# Altium PCB CH32F20xR-R0-1v0.PcbDoc
Units mil, origin at the board's own origin, x right, y up, seen from the top; angles counter-clockwise.
Board outline 2755.91 x 2559.06 mil, 2 copper layers (Top Layer, Bottom Layer); 44 components, 73 nets, 247 pads, 654 vias.
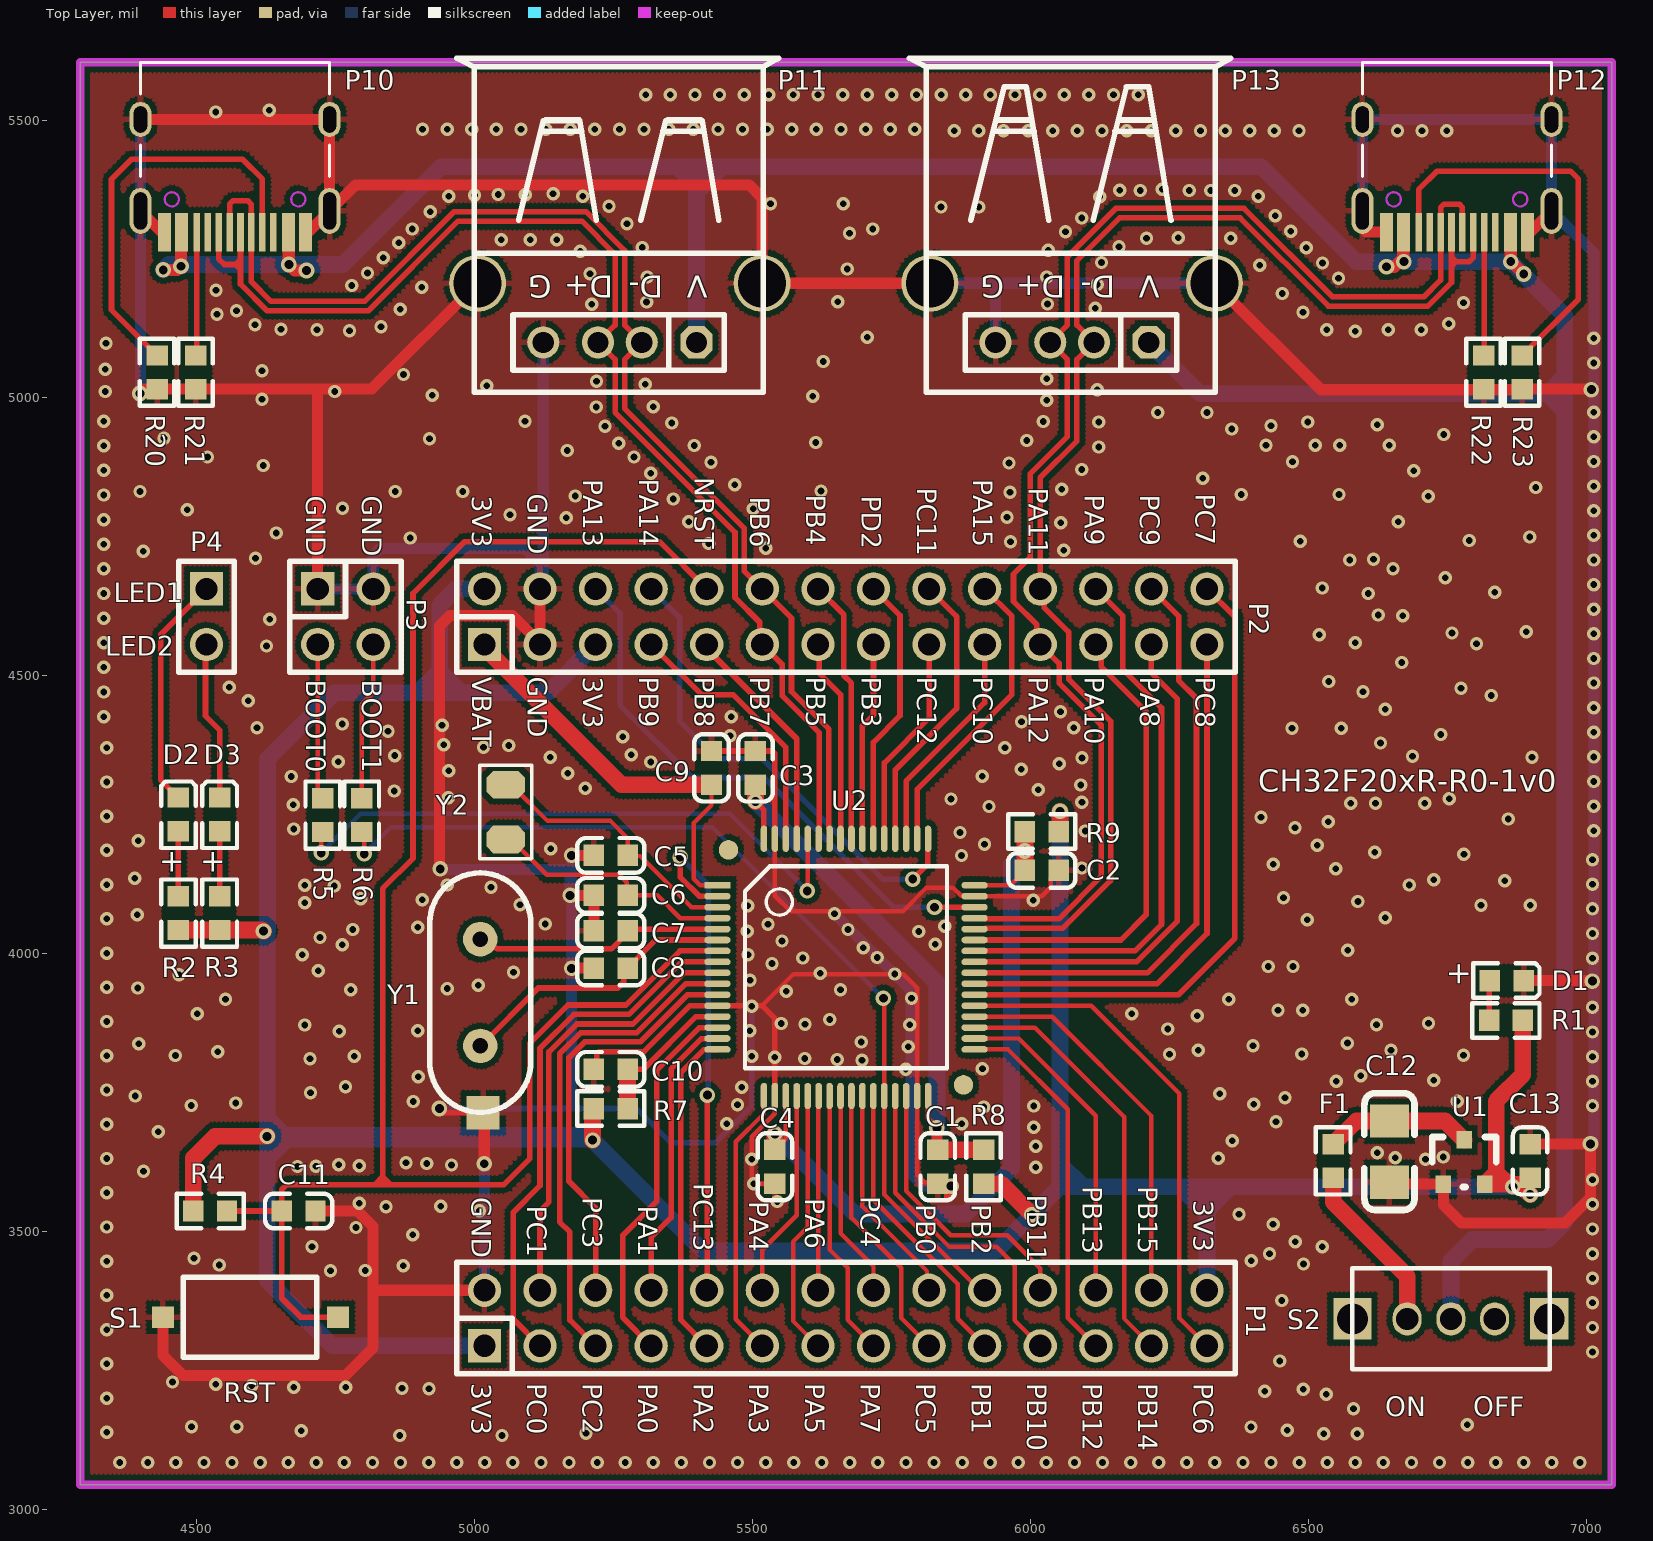
[diagram p0: Top Layer view]
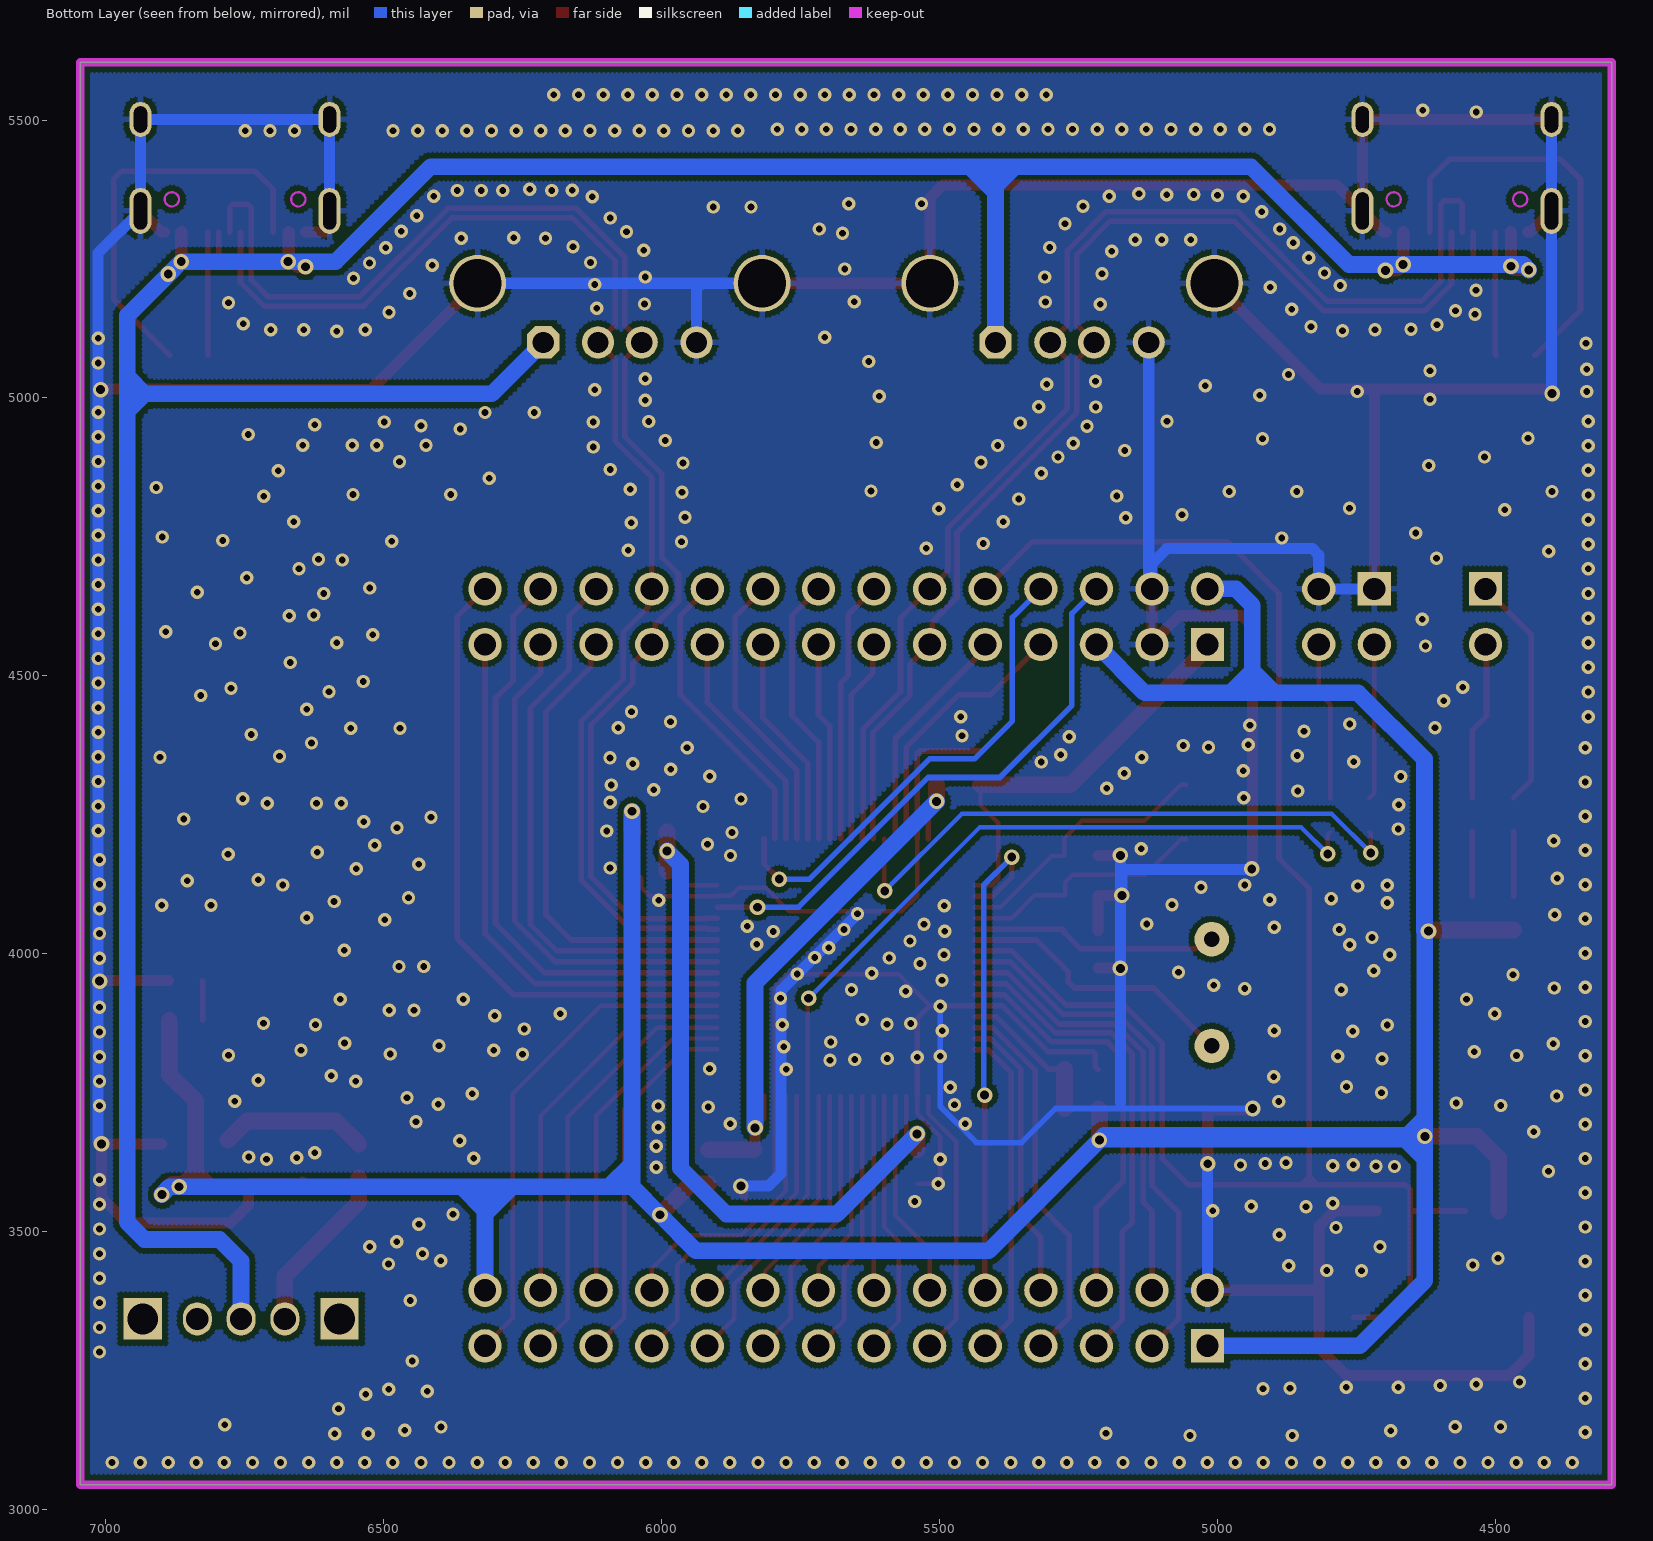
[diagram p1: Bottom Layer view, seen from below]

## Layer stack, top to bottom
Top Solder: solder mask 0.4, Solder Resist, Dk 3.5
Top Layer: signal copper 1.4
Dielectric 1: dielectric 12.6, FR-4, Dk 4.8
Bottom Layer: signal copper 1.4
Bottom Solder: solder mask 0.4, Solder Resist, Dk 3.5

## Board outline
4290,3045 4290,5604.06 7045.91,5604.06 7045.91,3045

## Design rules (kind name [scope] priority, off if disabled: settings)
Clearance Clearance_1 [InPolygon] p1: gap=10 ignorepadtopadclearanceinfootprint=FALSE
Clearance [All] p2: gap=6 ignorepadtopadclearanceinfootprint=FALSE
ComponentClearance [All] p1 off: gap=10 collisioncheckmode=3 verticalgap=10 showdistances=FALSE
DiffPairsRouting [All] p1: maxlimit=10 minlimit=7 mostfreqgap=8 toplayer_minwidth=6 toplayer_maxwidth=15 toplayer_prefwidth=8 bottomlayer_minwidth=6 bottomlayer_maxwidth=15 bottomlayer_prefwidth=8 maxuncoupledlength=500
MinimumSolderMaskSliver [All] p1 off: minsoldermaskwidth=10
PolygonConnect PolygonConnect_1 [IsVia] p1: connectstyle=Direct reliefconductorwidth=10 reliefentries=4 polygonreliefangle="90 Angle" airgapwidth=10
PolygonConnect [All] p2: connectstyle=Relief reliefconductorwidth=10 reliefentries=4 polygonreliefangle="90 Angle" airgapwidth=10
RoutingVias [All] p1: holewidth=16 width=28 viastyle="Through Hole" minholewidth=12 minwidth=24 maxholewidth=28 maxwidth=50
SilkToSilkClearance [All] p1 off: silktosilkclearance=10
SilkToSolderMaskClearance [IsPad] p1 off: minsilkscreentomaskgap=10 clearancetoexposedcopper=TRUE
SolderMaskExpansion [All] p1: expansion=4 istentingtop=FALSE
Width [All] p1: maxlimit=100 minlimit=6 preferedwidth=10
25 further rules are at their usual default settings.

## Classes and differential pairs
differential pair NewDifferentialPair2: +PB6 -PB7
differential pair NewDifferentialPair1: +PA12 -PA11

## Components (designator, comment, footprint, x,y, rotation, side; value= is the part's Value field where it differs from the comment)
C1 "0.1uF" 0603_C 5833,3586.5 r90 top value=15pF
C2 "0.1uF" 0603_C 6050.47,4149.94 r180 top value=15pF
C3 "0.1uF" 0603_C 5505,4364.76 r270 top value=15pF
C4 "0.1uF" 0603_C 5540,3586.5 r90 top value=15pF
C5 "12pF" 0603_C 5275,4177.13 r180 top
C6 "12pF" 0603_C 5275,4105.13 r180 top
C7 "22pF" 0603_C 5214.37,4041.13 r0 top
C8 "22pF" 0603_C 5214.37,3974.13 r0 top
C9 "0.1uF" 0603_C 5425.98,4304.13 r90 top value=15pF
C10 "0.1uF" 0603_C 5275,3792.13 r180 top value=15pF
C11 "0.1uF" 0603_C 4713.48,3537.23 r180 top
C12 "10uF" 3216_C 6645.62,3699.09 r90 top
C13 "2.2uF" 0603_C 6898.76,3596.94 r90 top
D1 "POWER  red" 0603+ 6826.38,3951.67 r0 top
D2 "LED1   blue" 0603+ 4466.87,4220.46 r90 top
D3 "LED2  blue" 0603+ 4541.14,4220.46 r90 top
F1 "500mA" 0603 6544.45,3596.94 r90 top
P1 "HEADER 14x2" IDC28-2.54MM 5017.45,3294.61 r90 top
P2 "HEADER 14x2" IDC28-2.54MM 5017.45,4556.42 r90 top
P3 "HEADER 2x2" IDC4-2.54MM 4717.45,4656.42 r0 top
P4 "HEADER 2" SIP2-2.54mm 4517.45,4656.42 r180 top
P10 "TYPE-C" TYPE-C-Receptacle-2.0 4568.76,5298.31 r180 top
P11 "USB_A" USBAF 5398.88,5100 r180 top
P12 "TYPE-C" TYPE-C-Receptacle-2.0 6767.14,5298.31 r180 top
P13 "USB_A" USBAF 6212.61,5100 r180 top
R1 "1K" 0603 6825,3880 r0 top
R2 "1K" 0603 4466.87,4042.81 r90 top
R3 "1K" 0603 4541.14,4042.81 r90 top
R4 "10K" 0603 4554.31,3537.23 r180 top
R5 "10K" 0603 4726.59,4219.09 r90 top
R6 "10K" 0603 4796.59,4219.09 r90 top
R7 "0Ω" 0603 5214.37,3721.36 r0 top value=10K
R8 "0Ω" 0603 5915.43,3586.5 r90 top value=10K
R9 "0Ω" 0603 6050.47,4219.77 r180 top value=10K
R20 "NC(5.1K)" 0603 4428.59,5076.43 r270 top
R21 "NC(5.1K)" 0603 4497.78,5076.43 r270 top
R22 "NC(5.1K)" 0603 6815.08,5076.43 r270 top
R23 "NC(5.1K)" 0603 6884.32,5076.43 r270 top
S1 "RST" SMD_6.1x3.65x2.5mm-KEY 4754,3346 r180 top
S2 "SW" KEY2 6756.26,3343 r180 top
U1 "CE6219" SOT-23 6742.6,3585.47 r0 top
U2 "CH32F205R" LQFP64M_10x10 5436.58,4123.15 r270 top
Y1 "8M" XT_AT49 5010,3834.13 r0 top
Y2 "32.768k" FC-135 5055.87,4304.13 r270 top

## Footprints (in the part's own frame and the unit in brackets; to place one, negate y for a bottom-side part, rotate by r counter-clockwise, add the part's x,y. Pads: shape width x height; smd on the part's side, far side on the other; paste and mask are expansions set on the pad)
0603 [mm]
  rect 0.93x0.98 smd: 1(0,0) 2(1.54,0)
  silkscreen extent -0.76,-0.79 2.3,0.79
0603+ [mm]
  rect 0.93x0.98 smd: 1(0,0) 2(1.54,0)
  silkscreen extent -0.76,-0.79 2.27,0.79
0603_C [mm]
  rect 0.93x0.98 smd: 1(0,0) 2(1.54,0)
  silkscreen extent -0.76,-0.79 2.31,0.79
3216_C [mil]
  rect 60x70 smd: 1(0,0) 2(-110,0)
  silkscreen extent -160,-45 50,45
FC-135 [mil]
  oct 50x70 smd: 1(0,0) 2(98.43,0)
  silkscreen extent -35,-47 133,47
IDC4-2.54MM [mil]
  rect 60x60 hole 40: 1(0,0)
  round 60 hole 40: 2(100,0) 3(0,-100) 4(100,-100)
  silkscreen extent -50,-150 150,50
IDC28-2.54MM [mil]
  rect 60x60 hole 40: 1(0,0)
  round 60 hole 40: 2(100,0) 3(0,-100) 4(100,-100) 5(0,-200) 6(100,-200) 7(0,-300) 8(100,-300) 9(0,-400) 10(100,-400) 11(0,-500) 12(100,-500) 13(0,-600) 14(100,-600) 15(0,-700) 16(100,-700) 17(0,-800) 18(100,-800) 19(0,-900) 20(100,-900) 21(0,-1000) 22(100,-1000) 23(0,-1100) 24(100,-1100) 25(0,-1200) 26(100,-1200) 27(0,-1300) 28(100,-1300)
  silkscreen extent -50,-1351 150,50
KEY2 [mm]
  rect 1.75x1.9 hole 1.4: 0(-4.5,0) 0(4.5,0)
  oval 1.321x1.524 hole 1.016: 1(0,0) 2(-2,0) 3(2,0)
  silkscreen extent -4.51,-2.31 4.5,2.29
LQFP64M_10x10 [mm]
  round 0.889 smd: 0(-1.619,0.508) 0(9.119,11.246)
  rect 0.3x1.2 smd: 1(0,0)
  oval 0.3x1.2 smd: 2(0.5,0) 3(1,0) 4(1.5,0) 5(2,0) 6(2.5,0) 7(3,0) 8(3.5,0) 9(4,0) 10(4.5,0) 11(5,0) 12(5.5,0) 13(6,0) 14(6.5,0) 15(7,0) 16(7.5,0) 33(7.5,11.754) 34(7,11.754) 35(6.5,11.754) 36(6,11.754) 37(5.5,11.754) 38(5,11.754) 39(4.5,11.754) 40(4,11.754) 41(3.5,11.754) 42(3,11.754) 43(2.5,11.754) 44(2,11.754) 45(1.5,11.754) 46(1,11.754) 47(0.5,11.754) 48(0,11.754)
  oval 1.2x0.3 smd: 17(9.627,2.127) 18(9.627,2.627) 19(9.627,3.127) 20(9.627,3.627) 21(9.627,4.127) 22(9.627,4.627) 23(9.627,5.127) 24(9.627,5.627) 25(9.627,6.127) 26(9.627,6.627) 27(9.627,7.127) 28(9.627,7.627) 29(9.627,8.127) 30(9.627,8.627) 31(9.627,9.127) 32(9.627,9.627) 49(-2.127,9.627) 50(-2.127,9.127) 51(-2.127,8.627) 52(-2.127,8.127) 53(-2.127,7.627) 54(-2.127,7.127) 55(-2.127,6.627) 56(-2.127,6.127) 57(-2.127,5.627) 58(-2.127,5.127) 59(-2.127,4.627) 60(-2.127,4.127) 61(-2.127,3.627) 62(-2.127,3.127) 63(-2.127,2.627) 64(-2.127,2.127)
  silkscreen extent -0.86,1.26 8.37,10.49
SIP2-2.54mm [mil]
  rect 60x60 hole 40: 1(0,0)
  round 60 hole 40: 2(0,100)
  silkscreen extent -50,-50 50,150
SMD_6.1x3.65x2.5mm-KEY [mm]
  rect 1x1 smd: 1(0,0) 2(8,0)
  silkscreen extent 0.98,-1.83 7.08,1.83
SOT-23 [mm]
  rect 0.7x0.8 smd: 1(0,0) 2(1.9,0) 3(0.95,2.02)
  silkscreen extent -0.51,-0.13 2.41,2.16
TYPE-C-Receptacle-2.0 [mm]
  oval 1x2.1 hole 0.6 slot 1.7 at 90 deg: 0(-4.32,-0.97) 0(4.32,-0.97)
  oval 1x1.6 hole 0.6 slot 1.2 at 90 deg: 0(-4.32,-5.15) 0(4.32,-5.15)
  rect 0.6x1.75 smd: A1(-3.225,0) A4(-2.45,0) B1(3.225,0) B4(2.45,0)
  rect 0.3x1.75 smd: A5(-1.25,0) A6(-0.25,0) A7(0.25,0) A8(1.25,0) B5(1.75,0) B6(0.75,0) B7(-0.75,0) B8(-1.75,0)
  Keep-Out Layer circle w0.1: c-2.89,-1.5 r0.325
  Keep-Out Layer circle w0.1: c2.89,-1.5 r0.325
  silkscreen extent -4.32,-7.75 4.32,-2.55
USBAF [mm]
  round 2.6 hole 2.2: 0(-3,-2.7) 0(10,-2.7)
  oct 1.473x1.473 hole 0.965: 1(0,0)
  round 1.473 hole 0.965: 2(2.5,0) 3(4.5,0) 4(7,0)
  silkscreen extent -3.75,-12.99 10.95,2.29
XT_AT49 [mil]
  rect 60x60 smd: 0(5,-120)
  round 62 hole 28: 1(0,0) 2(0,192.13)
  silkscreen extent -91,-119 91,311

## Part data
C1 C2 C3 C4 C5 C6 C7 C8 C9 C10 C11: library part Cap, "Capacitor", LatestRevisionDate=17-Jul-2002, LatestRevisionNote="Re-released for DXP Platform.", PackageReference=RAD-0.3, Published=8-Jun-2000, Publisher="Altium Limited"
C12 C13: library part CAP, "Capacitor"
D1 D2 D3: library part LED0, "Typical INFRARED GaAs LED", LatestRevisionDate=08-Jul-2005, LatestRevisionNote="Mech Layer 1 removed.", PackageReference=LED-0, Published=8-Jun-2000, Publisher="Altium Limited"
F1: library part FUSE1, "Fuse"
P1 P2: "Header, 14-Pin, Dual row"
P3: "Header, 2-Pin, Dual row"
P4: "Header, 2-Pin"
P10 P12: library part TYPE-C1
P11 P13: library part USB, "USB Port"
R1 R2 R3: library part "Res Semi", "Semiconductor Resistor", LatestRevisionDate=17-Jul-2002, LatestRevisionNote="Re-released for DXP Platform.", PackageReference=AXIAL-0.5, Published=8-Jun-2000, Publisher="Altium Limited"
R4 R5 R6 R7 R8 R9 R20 R21 R22 R23: library part Res2, "Resistor"
  R4 R5 R6 R7 R8 R9: LatestRevisionDate=17-Jul-2002, LatestRevisionNote="Re-released for DXP Platform.", PackageReference=AXIAL-0.4, Published=8-Jun-2000, Publisher="Altium Limited"
S1: library part KEY
U1: library part 6219P33M
U2: library part CH32F203R, "ARM M3 HD-MCU, 144MHz, 8*UART, 10*Timer, 4*OPA"
Y1 Y2: library part XTAL, "Crystal Oscillator", LatestRevisionDate=17-Jul-2002, LatestRevisionNote="Re-released for DXP Platform.", PackageReference=R38, Published=8-Jun-2000, Publisher="Altium Limited"

## Via types
v1: diameter 24, hole 12, Top Layer to Bottom Layer, tented both sides, 616 vias
v2: diameter 28, hole 16, Top Layer to Bottom Layer, tented both sides, 38 vias

## Nets (pads, with @x,y where several pads share a name; then routed paths per layer and width w, separated by ;. In a path a pad name is that pad's centre, name@x,y a point inside that pad or via, vN(x,y) a via of type N, cw(c..) or ccw(c..) an arc to the next point about the centre after c; other vN are vias at no path point)
+5V: P10.A4 P10.B4 P11.1 P12.A4 P12.B4 P13.1 S2.1 | length 6409.9
  Top Layer w22: v2(4439.62,5230.28) 4464.93,5230.28 v2(4471.49,5236.84) 4471.49,5297.49 P10.B4 ; P10.A4 4665.22,5240.39 v2(4665.56,5240.05) 4676.3,5229.31 v2(4697.39,5229.31) ; v2(6640.39,5235.94) 6654.42,5235.94 v2@6670.69,5252.21 ; P12.B4 v2@6670.69,5252.21 ; v2(6671.78,5245.29) 6670.69,5246.38 v2@6670.69,5252.21 ; v2(6863.9,5245.29) v2@6863.9,5246.38 ; v2(6887.3,5222.99) v2@6863.9,5246.38 ; v2@6863.9,5246.38 6863.6,5246.68 P12.A4 6863.9,5298 v2@6863.9,5246.38
  Bottom Layer w22: v2(4697.39,5229.31) v2@4698.55,5230.47 ; v2(6887.3,5222.99) v2@6887.81,5222.99
  Bottom Layer w30: v2(4439.62,5230.28) 4449.39,5240.05 v2@4474.7,5240.05 ; v2(4471.49,5236.84) v2@4474.7,5240.05 ; P11.1 5398.88,5369.42 ; P13.1 6305.29,5007.33 6929.89,5007.33 ; S2.1 6756.26,3447.53 6794.71,3485.99 6929.94,3485.99 6960.83,3516.88 6960.83,4976.39 ; v2@4474.7,5240.05 v2(4665.56,5240.05) 4697.39,5240.05 4763.33,5240.05 4939.25,5415.97 5364.12,5415.97 ; 5364.12,5415.97 5398.88,5415.97 ; 5364.12,5415.97 5398.88,5381.21 ; 5398.88,5369.42 5398.88,5381.21 ; 5398.88,5369.42 5445.43,5415.97 ; 5398.88,5381.21 5398.88,5415.97 ; 5398.88,5415.97 5445.43,5415.97 ; 5445.43,5415.97 6415.27,5415.97 6585.95,5245.29 6640.39,5245.29 v2(6671.78,5245.29) v2(6863.9,5245.29) 6886.75,5222.44 6960.83,5148.36 6960.83,5038.27 ; 6929.89,5007.33 6960.83,4976.39 ; 6929.89,5007.33 6960.83,5007.33 ; 6929.89,5007.33 6960.83,5038.27 ; 6960.83,4976.39 6960.83,5007.33 ; 6960.83,5007.33 6960.83,5038.27
BOOT0: R5.1 U2.60 | length 1093.1
  Top Layer w8: v2(4723.93,4181.62) 4723.93,4216.42 R5.1 ; v2(5598.16,4113.21) 5599.06,4114.11 U2.60
  Bottom Layer w8: v2(4723.93,4181.62) 4793.89,4251.59 5459.78,4251.59 v2(5598.16,4113.21)
BOOT1: P1.20 R6.1 U2.28 | length 1727.9
  Top Layer w8: R6.1 4801.28,4214.4 v2(4801.28,4179.69) ; v2(5735.07,3919.93) 5736.85,3918.15 U2.28 5736.85,3566.94 5909.18,3394.61 P1.20
  Bottom Layer w8: v2(4801.28,4179.69) 4848.9,4227.3 5427.7,4227.3 v2(5735.07,3919.93)
GND: C1.1 C2.1 C3.1 C4.1 C5.2 C6.2 C7.1 C8.1 C9.2 C10.2 C11.1 C12.2 C13.2 D1.2 P1.2 P2.3 P2.4 P3.1 P3.2 P10.0 P10.A1 P10.B1 P11.0 P11.4 P12.0 P12.A1 P12.B1 P13.0 P13.4 R20.2 R21.2 R22.2 R23.2 S1.2 U1.1 U2.12 U2.18 U2.31 U2.47 U2.63 Y1.0 | length 15990.7
  Top Layer w8: 5516.71,3906.61 5573.58,3963.48 5770.98,3963.48 5795.91,3938.56 U2.31 5795.91,3602.39 5809.22,3589.07 5831.42,3589.07 5848.29,3572.2 5848.29,3557.18 5857.16,3566.05 v2(5857.16,3582.01) ; C4.1 v1(5501.88,3586.5) 5498.37,3590.02 5498.37,3670.74 5540,3712.37 U2.18 ; U2.63 5540,4104.45 5568.32,4076.13 5769.92,4076.13 5812.86,4119.07 5860.19,4119.07 5875.07,4104.19 5898.6,4104.19 U2.47 6020.19,4103.46 6036.17,4119.44 6036.17,4135.64 C2.1
  Top Layer w10: v2(4936.31,3721.57) 4943.75,3714.13 Y1.0 ; C10.2 5219.18,3796.94 5219.18,3819.63 5223.57,3824.02 5304.68,3824.02 5387.27,3906.61 U2.12 5516.71,3906.61 5540,3883.33 U2.18 ; C9.2 C3.1 5535.61,4364.76 5540,4360.37 U2.63
  Top Layer w20: v2(4397.49,5008.02) 4405.26,5015.8 R20.2 R21.2 4717.45,5015.8 ; P10.0@4398.69,5336.5 4436.87,5298.31 P10.B1 ; P10.0@4398.69,5501.06 4738.84,5501.06 P10.0@4738.84,5336.5 ; S1.2 4439.04,3277.49 4475.02,3241.51 4767.37,3241.51 4816.95,3291.08 4816.95,3400.03 ; P10.A1 4700.65,5298.31 P10.0@4738.84,5336.5 ; C11.1 4788.7,3537.23 4816.95,3508.98 4816.95,3400.03 ; P3.1 4717.45,5015.8 ; v2(4938.03,4152.8) 4936.62,4154.21 4936.62,4589.73 4955.28,4608.39 5068.05,4608.39 5117.45,4558.98 P2.4 ; P11.0@5005.18,5206.3 4814.68,5015.8 4717.45,5015.8 ; Y1.0 5018.69,3710.44 5017.09,3708.84 v2(5017.09,3622.19) ; P1.2 4822.37,3394.61 4816.95,3400.03 ; v2(5171.67,4105.13) C6.2 C7.1 ; v2(5174.32,3973.63) 5174.82,3974.13 C8.1 ; v2(5174.3,4177.13) C5.2 ; P13.0@5818.91,5206.3 5516.99,5206.3 5516.99,5360.13 5494.23,5382.89 4785.23,5382.89 P10.0@4738.84,5336.5 ; P13.0@6330.72,5206.3 6522.3,5014.73 6883.25,5014.73 R23.2 7008.45,5015.8 v2(7009.13,5015.11) ; P12.0@6597.06,5336.5 6597.06,5304.55 6603.31,5298.31 P12.B1 ; C12.2 6649.24,3585.47 U1.1 6742.6,3548.06 6774.99,3515.66 6961.2,3515.66 7007.42,3561.89 v2(7007.42,3657.84) 6899.03,3657.84 C13.2 ; D1.2 7009.67,3951.67 v2(7010.67,3950.67) ; P12.A1 6899.03,5298.31 P12.0@6937.22,5336.5
  Bottom Layer w10: v2(4936.31,3721.57) 5290.75,3721.57 5352.16,3660.16 5433.46,3660.16 5498.38,3725.08 v1(5498.38,3905.81)
  Bottom Layer w20: v2(4397.49,5008.02) 4398.69,5009.22 4398.69,5336.5 P10.0@4398.69,5501.06 ; P3.1 P3.2 4817.45,4717.34 4828.92,4728.81 5090.83,4728.81 5117.45,4702.19 P2.4 5123.29,4662.26 P11.4 ; v2(4938.03,4152.8) 4938.03,4151.36 5171.67,4151.36 v2(5171.67,4105.13) ; v2(5017.09,3622.19) 5017.45,3621.83 P1.2 ; 5174.3,3732.72 v2@5174.3,4105.13 ; v2@5174.3,4106.7 v2(5174.3,4177.13) ; v1(5647.27,4071.81) 5784.78,3934.3 5784.78,3605.05 5807.81,3582.01 v2(5857.16,3582.01) ; P13.0@5818.91,5206.3 5927.25,5206.3 ; P13.4 5937.02,5196.52 5927.25,5206.3 ; P13.0@6330.72,5206.3 5927.25,5206.3 ; P12.0@6597.06,5336.5 6597.06,5501.06 6937.22,5501.06 6937.22,5336.5 7013.39,5260.33 7013.39,3663.81 v2(7007.42,3657.84) ; v2(7009.13,5015.11) v2@7010.79,5015.11
  other v1: 4361.35,3084.64 4411.87,3084.64 4462.39,3084.64 4512.91,3084.64 4563.43,3084.64 4613.95,3084.64 4664.46,3084.64 4714.98,3084.64 4765.5,3084.64 4816.02,3084.64 4866.54,3084.64 4917.06,3084.64 4967.58,3084.64 5018.1,3084.64 5068.62,3084.64 5119.14,3084.64 5169.66,3084.64 5220.18,3084.64 5270.7,3084.64 5321.22,3084.64 5371.73,3084.64 5422.25,3084.64 5472.77,3084.64 5523.29,3084.64 5573.81,3084.64 5624.33,3084.64 5674.85,3084.64 5725.37,3084.64 5775.89,3084.64 5826.41,3084.64 5876.93,3084.64 5927.45,3084.64 5977.97,3084.64 6028.49,3084.64 6079,3084.64 6129.52,3084.64 6180.04,3084.64 6230.56,3084.64 6281.08,3084.64 6331.6,3084.64 6382.12,3084.64 6432.64,3084.64 6483.16,3084.64 6533.68,3084.64 6584.2,3084.64 6634.72,3084.64 6685.24,3084.64 6735.76,3084.64 6786.27,3084.64 6836.79,3084.64 6887.31,3084.64 6937.83,3084.64 6988.35,3084.64 4864.98,3133.34 5049.17,3133.34 6527.64,3136.21 6587.74,3136.21 5200.24,3137.48 4337.7,3139.01 4688.03,3141.62 6462.08,3143.04 4490.4,3148.86 4572.14,3148.86 6396.52,3148.5 6785.65,3152.6 6580.91,3181.28 4337.7,3200.6 6531.74,3207.23 6421.1,3212.7 4917.75,3217.15 6490.76,3216.8 4869.12,3218.19 4674.58,3220.26 4767.71,3220.26 4599.05,3223.36 4533.86,3225.43 4456.25,3229.57 4337.7,3262.18 6448.42,3267.33 7010.97,3283.4 4337.7,3323.77 7010.97,3327.69 7010.97,3371.98 6451.98,3376.13 4337.7,3385.35 7010.97,3416.28 4740.62,3429.52 4803.28,3430.29 4871.35,3438.8 4540.33,3439.96 6491.1,3441.79 4337.7,3446.93 6397.2,3447.5 4494.88,3452.36 6429.77,3460.27 7010.97,3460.57 4707.36,3472.84 6525.05,3473.04 6476.2,3481.69 4888.37,3494.5 7010.97,3504.87 4786.26,3507.65 4337.7,3508.52 6436.32,3513.17 6375,3531.64 5008.27,3537.82 4840.41,3544.78 4938.65,3545.55 7010.97,3549.16 4792.45,3550.97 5544,3554.2 4337.7,3570.1 7010.97,3593.45 4404.1,3608.86 6009.57,3615.91 4681.17,3617.2 4714.41,3617.99 4792.38,3618.78 4755.18,3620.37 4958.3,3620.11 4913.92,3622.75 4876.4,3623.8 5498.37,3630.38 6710.46,3630.43 4337.7,3631.69 6337.91,3632.31 6656,3633.09 6742.75,3634.26 6623.71,3642.04 6009.57,3653.41 6362.71,3663.79 4430.54,3679.69 6005.94,3687.89 4337.7,3693.27 5453.38,3694.34 5876.49,3693.94 6441.71,3697.98 5915.81,3724.19 6005.94,3726 7010.97,3726.34 4490.04,3726.91 5472.77,3728.12 6401.83,3729.46 4570.32,3731.64 4889.24,3734.12 6767.92,3734.49 6457.86,3741.1 4389.4,3744.06 6340.5,3747.93 4704.65,3750 4337.7,3754.86 4767.42,3760.46 5480.52,3759.69 6550.02,3770.59 7010.97,3770.63 6725.28,3772.73 4898.54,3778.87 6594.31,3780.37 5775.64,3792.11 5913.39,3793.15 5696.68,3808.13 5652.24,3809.91 4703.7,3810.87 5593.58,3811.68 5540,3813.73 5498.38,3815.44 7010.97,3814.92 4337.7,3816.44 4783.22,3815.72 4461.5,3816.94 6778.93,3817.64 6250.03,3819.04 6488.06,3819.73 4537.51,3823.99 6301.47,3826.33 6648.57,3826.26 5779.77,3832.87 6400.32,3834.32 4395.67,3838.1 6570.06,3839.31 5695.5,3841.31 7010.97,3859.22 4756.01,3860.33 4897.27,3861.31 5494.63,3861.46 6247.09,3864.57 4694.19,3871.74 5782.73,3872.45 6622.42,3872.14 5594.17,3873.31 5551.51,3874.49 6715.84,3875.25 4337.7,3878.03 5638.61,3881.6 6299.66,3888.35 4500.68,3892.17 6182.2,3892.18 6445.24,3898.36 6489.54,3898.36 7010.97,3903.51 4551.67,3918.04 6356.65,3918.02 6578.12,3918.02 5785.68,3919.71 5560.4,3932.56 4777.13,3934.99 5658.07,3935.07 4950.43,3937.36 4393.64,3938.32 4337.7,3939.61 5006.44,3943.45 5495.22,3952.12 4467.83,3962.1 5755.6,3963.48 5621.45,3965.2 5069.87,3966.94 4718.23,3969.4 6427.78,3976.99 6472.07,3976.99 5534.92,3982.34 5590.14,3992.38 7010.97,3992.1 5724.08,3993.4 4689.52,3998.22 5491.66,3998.33 4337.7,4001.2 6570.79,4006.11 5699,4010.65 4761.53,4016.13 5828.56,4017.11 5552.92,4023.1 4721.67,4029.19 7010.97,4036.39 5490.48,4040.4 5799.09,4040.04 4780.77,4043.62 5671.56,4043.57 4897.62,4047.6 5845.59,4049.21 5527.51,4053.22 5126.62,4053.65 6497.77,4061.22 4337.7,4062.78 6638.37,4064.69 4393.07,4070.44 7010.97,4080.69 5491.07,4086.62 5081.43,4088.04 6810.42,4087.57 6899.01,4087.57 4694.18,4091.73 6588.95,4094.17 6004.91,4096.26 4905.73,4097.08 4795.2,4099.29 6455.06,4100.97 5029.37,4119.47 4747.1,4121.96 4694.18,4123.34 4337.7,4124.37 4950.34,4123.84 6681.11,4123.66 7010.97,4124.98 6853.13,4131.38 6725.4,4133.45 4388.04,4135.92 6549.07,4153.15 6092.4,4154.27 6436.75,4161.33 7010.97,4169.27 5875.85,4176.83 6779.66,4179.33 6619.15,4182.63 4337.7,4185.95 5136.55,4189.13 6515.76,4195.52 5917.2,4196.96 4394.51,4203.56 5873.13,4218.18 6098.4,4220.91 7013.34,4221.27 4674.44,4224.49 6475.88,4227 6535.51,4237.28 6859.34,4242.5 6414.55,4245.47 4337.7,4247.54 5925.36,4264.97 7013.34,4265.56 4673.64,4268.16 6576.33,4271.09 6620.63,4271.09 6709.21,4271.09 6092.4,4272.53 5856.81,4278.57 6753.51,4278.76 4952.58,4280.88 4855.29,4292.95 6013.62,4295.22 5198.56,4297.7 6090,4303.75 4337.7,4309.12 7013.34,4309.86 4669.67,4318.97 5912.91,4319.35 5167.58,4325.04 4953.39,4329.39 5983.15,4331.96 6051.46,4342.03 4754.62,4345.17 5316.76,4345.14 6092.62,4352.36 5135.99,4353.59 6902.05,4353.62 7013.34,4354.15 6687.29,4355.42 4855.92,4356.55 5281.88,4358.25 4337.7,4370.71 5015.65,4371.44 5953.87,4370.91 5060.93,4374.68 4944.49,4376.29 6629.58,4379.3 5266.32,4390.44 5459.27,4392 6737.9,4394.34 7013.34,4398.44 4844.07,4400.2 4608.18,4406.37 6077.47,4406.34 6470.28,4405.56 6558.87,4405.56 4941.26,4411.06 4761.77,4413.45 5983.65,4417.25 5461.36,4426.18 4332.61,4426.69 6053.8,4435.69 6637.87,4439.75 7013.34,4442.74 4592.33,4454.98 6828.58,4464.74 4332.61,4470.99 6597.99,4471.22 6774.32,4477.61 4558.52,4479.28 7013.34,4487.03 6536.66,4489.7 4332.61,4515.28 6668.07,4524.08 7013.34,4531.33 4625.47,4553.74 6802.43,4557.67 4332.61,4559.57 6584.43,4559.68 6519.2,4573.83 7013.34,4575.62 6758.13,4577.04 6892.1,4579.43 4631.32,4601.64 4332.61,4603.87 6669.55,4608.41 6625.25,4609.4 7013.34,4619.91 4332.61,4648.16 6607.78,4648.14 6834.89,4650.6 6524.83,4657.97 7013.34,4664.21 6746.3,4676.46 4332.61,4692.46 6652.08,4692.73 6574.25,4708.3 7013.34,4708.5 6616.99,4710 4605.62,4711.45 4403.52,4724.3 6059.66,4725.84 5523.42,4729.78 4332.61,4736.75 5421.13,4738.24 5964.01,4741.18 6484.95,4742.11 6789.02,4743.53 4883.92,4747.88 6898.24,4749.91 7013.34,4752.8 4643,4757.01 6054.24,4775.46 5384.98,4777.46 6661.29,4777.06 4332.61,4781.04 5164.71,4784.73 5957.69,4785.39 5063.55,4789.72 7013.34,4797.09 4482.95,4799.06 4762.15,4801.4 5501.12,4800.53 5357.29,4818.22 6715.54,4822.94 5180.72,4823.55 4332.61,4825.34 6379.33,4826.25 6555.03,4826.25 5963.11,4830.51 4397.68,4831.77 4856.78,4831.77 4978.27,4831.77 5623.05,4832.62 6056.05,4835.92 6908.99,4838.99 7013.34,4841.38 5468.04,4843.61 6309.75,4855.73 5316.74,4864.41 6689.39,4868.83 4332.61,4869.63 6092.14,4871.11 4619.63,4878.5 5961.3,4882.84 5425.17,4884.22 6471.39,4885.22 7013.34,4885.68 4519.17,4893.69 5286.51,4893.87 5166.35,4905.37 6122.82,4911.71 4332.61,4913.93 5394.92,4914.47 6423.63,4914.71 6512.22,4914.71 6556.51,4914.71 6645.1,4914.71 5258.95,4918.37 5613.59,4919.69 5992.88,4923.44 4918.69,4926.4 4440.9,4927.57 7013.34,4929.97 6743.12,4934.22 6361.75,4944.19 5234.46,4948.98 6432.63,4949.75 6623.82,4951.5 5354.6,4954.79 6122.82,4956.83 6498.98,4956.74 4332.61,4958.22 5090.42,4957.94 6022.66,4957.73 6228.98,4973.68 6317.57,4973.68 7013.34,4974.27 5218.77,4983.81 5320.99,4984.2 6028.98,4995.63 4617.3,4997.66 5607.91,5002.97 4923.37,5004.67 4335.49,5011.7 4748.14,5011.68 6120.11,5014.58 5021.5,5022.19 5306.71,5024.52 5219.15,5030.11 6028.98,5034.43 4871.97,5042.05 4617.3,5049.06 4335.49,5051.56 7013.34,5062.85 5626.84,5065.43 4336.49,5098.39 7013.34,5107.15 5706.33,5108.96 6584.43,5119.88 4774.8,5120.78 4716.35,5122.57 6532.61,5122.9 6643.32,5122.62 6702.89,5122.62 4651.34,5123.76 4831.46,5127.94 4604.82,5131.52 6752.19,5133.57 4536.23,5150.6 6490.21,5153.99 4571.42,5156.57 4866.05,5159.55 6116.44,5161.41 5210.26,5168.28 6030.34,5168.9 6778.9,5171.23 5309.18,5172.7 5653.34,5173.31 6452.9,5187.91 4534.44,5193.54 4904.82,5198.91 4778.98,5202.28 6120.19,5204.08 6554.1,5215.62 5310.28,5217.46 6028.84,5217.56 5207.5,5223.54 4807.1,5224.69 5670.37,5231.99 6412.2,5238.79 6525.26,5242.75 6127.67,5243.77 4835.44,5251.94 5189.81,5263.88 6031.84,5265.48 6495.87,5270.45 5301.44,5270.51 6159.12,5272.22 4863.13,5279.34 5047.79,5284.33 5099.74,5284.33 5147.26,5284.33 6208.53,5287.19 6360.19,5287.41 6265.44,5287.94 5674.16,5296.34 6062.82,5299.28 6468.17,5299.85 4887.44,5304.03 5715.8,5303.91 5273.81,5313.62 6092.22,5323.59 6440.46,5327.55 4919.99,5335.08 5838.82,5343.66 5906.96,5343.66 5241.68,5344.78 5532.2,5349.34 5662.8,5349.34 6124.44,5362.04 4952.99,5362.67 5194.35,5362.94 6409.37,5362.6 4999.49,5364.46 5042.42,5366.03 5090.71,5365.58 5140.96,5367.35 6197.37,5373.34 6285.56,5373.34 6324.01,5373.34 6367.54,5373.34 6160.63,5373.91 6236.94,5375.6 5862.75,5480.85 5907.04,5480.85 5951.34,5480.85 5995.63,5480.85 6039.93,5480.85 6084.22,5480.85 6128.51,5480.85 6172.81,5480.85 6217.1,5480.85 6261.4,5480.85 6305.69,5480.85 6349.98,5480.85 6394.28,5480.85 6438.57,5480.85 6482.86,5480.85 6660.04,5480.85 6704.33,5480.85 6748.63,5480.85 4906.01,5483.67 4950.3,5483.67 4994.6,5483.67 5038.89,5483.67 5083.18,5483.67 5127.48,5483.67 5171.77,5483.67 5216.06,5483.67 5260.36,5483.67 5304.65,5483.67 5348.95,5483.67 5393.24,5483.67 5437.53,5483.67 5481.83,5483.67 5526.12,5483.67 5570.42,5483.67 5614.71,5483.67 5659,5483.67 5703.3,5483.67 5747.59,5483.67 5791.89,5483.67 4534.22,5514.54 4630.27,5517.45 5307.58,5545.7 5351.88,5545.7 5396.17,5545.7 5440.46,5545.7 5484.76,5545.7 5529.05,5545.7 5573.35,5545.7 5617.64,5545.7 5661.93,5545.7 5706.23,5545.7 5750.52,5545.7 5794.81,5545.7 5839.11,5545.7 5883.4,5545.7 5927.7,5545.7 5971.99,5545.7 6016.28,5545.7 6060.58,5545.7 6104.87,5545.7 6149.17,5545.7 6193.46,5545.7
LED1: D2.2 P4.1 | length 422.7
  Top Layer w10: D2.2 4435,4312.97 4435,4573.96 P4.1
LED2: D3.2 P4.2 | length 286.7
  Top Layer w10: P4.2 4515.62,4554.58 4515.62,4427.89 4541.14,4402.37 D3.2
NetD1_1: D1.1 R1.1 | length 72.2
  Top Layer w10: R1.1 6825,3950.29 D1.1
NetD2_1: D2.1 R2.2 | length 117
  Top Layer w10: R2.2 D2.1
NetD3_1: D3.1 R3.2 | length 117
  Top Layer w10: R3.2 D3.1
NetF1_1: F1.1 S2.3 | length 309.1
  Top Layer w30: F1.1 6544.45,3553.14 6677.52,3420.07 S2.3
NetP3_3: P3.3 R5.2 | length 280.5
  Top Layer w8: P3.3 4717.45,4288.86 R5.2
NetP3_4: P3.4 R6.2 | length 285.3
  Top Layer w8: R6.2 4796.59,4448.65 4817.45,4469.51 P3.4
NetP10_A5: P10.A5 R20.1 | length 747.6
  Top Layer w10: R20.1 4346.5,5158.51 4346.5,5393.46 4382.5,5429.46 4582.14,5429.46 4617.98,5393.63 P10.A5
NetP10_B5: P10.B5 R21.1 | length 222.7
  Top Layer w10: R21.1 4499.87,5078.51 P10.B5
NetP12_A5: P12.A5 R22.1 | length 222.4
  Top Layer w10: R22.1 6816.35,5077.7 P12.A5
NetP12_B5: P12.B5 R23.1 | length 742.7
  Top Layer w10: P12.B5 6698.24,5374.74 6731.61,5408.11 6971.2,5408.11 6985.44,5393.87 6985.44,5177.55 R23.1
NRST: C11.2 P2.10 R4.1 S1.1 U2.7 | length 3226.4
  Top Layer w10: R4.1 C11.2 ; S1.1 4687.09,3346 4652.85,3380.24 C11.2 ; 4834.44,3585.66 4834.44,3598.93 ; 4854.77,3584.77 4848.6,3584.77 ; P2.10 5332.32,4741.55 4982.03,4741.55 4888.92,4648.44 4888.92,4171.63 4834.44,4117.16 4834.44,3598.93 ; U2.7 5369.13,4005.04 5271.92,3907.83 5167.98,3907.83 5099.28,3839.13 5099.28,3631.53 5052.52,3584.77 4848.6,3584.77 ; C11.2 4652.85,3575.66 4661.96,3584.77 4820.28,3584.77 ; 4820.28,3584.77 4848.6,3584.77 ; 4820.28,3584.77 4834.44,3598.93 ; 4834.44,3598.93 4848.6,3584.77
PA0: P1.7 U2.14 | length 683.4
  Top Layer w10: P1.7 5266.26,3345.8 5266.26,3493.27 5327.84,3554.86 5327.84,3790.89 5404.2,3867.24 U2.14
PA1: P1.8 U2.15 | length 519
  Top Layer w10: P1.8 5317.45,3489.82 5353.19,3525.56 5353.19,3792.65 5407.75,3847.21 5436.23,3847.21 U2.15
PA2: P1.9 U2.16 | length 594.2
  Top Layer w10: P1.9 5370.42,3341.64 5370.42,3785.74 5412.21,3827.53 5436.23,3827.53 U2.16
PA3: P1.11 U2.17 | length 490.2
  Top Layer w8: P1.11 5469.75,3342.31 5469.75,3661.92 5520.32,3712.48 U2.17
PA4: P1.12 U2.20 | length 375.2
  Top Layer w8: P1.12 5517.45,3467.53 5579.37,3529.44 U2.20
PA5: P1.13 U2.21 | length 478.9
  Top Layer w8: U2.21 5599.06,3508.24 5572.78,3481.97 5572.78,3339.28 P1.13
PA6: P1.14 U2.22 | length 350.1
  Top Layer w8: P1.14 5618.1,3395.25 5618.1,3743.49 U2.22
PA7: P1.15 U2.23 | length 482.3
  Top Layer w8: U2.23 5638.43,3467.83 5670.9,3435.36 5670.9,3341.16 P1.15
PA8: P2.25 U2.41 | length 912.3
  Top Layer w10: U2.41 6190.85,3985.35 6264.19,4058.69 6264.19,4458.58 6217.45,4505.31 P2.25
PA9: P2.24 U2.42 | length 1008.6
  Top Layer w10: U2.42 6187.91,4005.04 6235.54,4052.67 6235.54,4442.54 6165.65,4512.43 6165.65,4608.22 P2.24
PA10: P2.23 U2.43 | length 851.3
  Top Layer w10: U2.43 6162.62,4024.72 6208.04,4070.15 6208.04,4435.66 6127.02,4516.68 6127.02,4546.85 P2.23
PA11: P2.22 P12.A7 P12.B7 P13.2 U2.44 | length 2492.9
  Top Layer w10: U2.44 5917.54,4044.41 5918.88,4045.75 6057.83,4045.75 6143.92,4131.84 6143.92,4418.63 6068.45,4494.1 6068.45,4578.88 6024.97,4622.36 6024.97,4648.9 P2.22 6017.45,4856.58 6083.32,4922.45 6083.32,5069.13 P13.2 6083.32,5130.87 6083.32,5246.97 6160.28,5323.92 6377.04,5323.92 6535.86,5165.1 6714.93,5165.1 6757.3,5207.47 6757.3,5236.91 ; P12.A7 6757.3,5253.67 ; P12.B7 6796.67,5252.7 6789.26,5245.29 6765.68,5245.29 ; 6757.3,5236.91 6757.3,5245.29 ; 6757.3,5236.91 6765.68,5245.29 ; 6757.3,5245.29 6757.3,5253.67 ; 6757.3,5245.29 6765.68,5245.29 ; 6757.3,5253.67 6765.68,5245.29
PA12: P2.21 P12.A6 P12.B6 P13.3 U2.45 | length 2510.6
  Top Layer w10: U2.45 5917.54,4064.09 5918.88,4062.75 6050.79,4062.75 6126.92,4138.88 6126.92,4411.59 6051.45,4487.06 6051.45,4522.42 6027.02,4546.85 P2.21 6011.39,4562.48 6011.39,4591.93 5969.32,4634 5969.32,4683.07 5999.14,4712.89 5999.14,4863.38 6066.32,4930.56 6066.32,5069.13 P13.3 6066.32,5130.87 6066.32,5210.17 6066.32,5254.01 6153.23,5340.92 6197.07,5340.92 6384.08,5340.92 6542.9,5182.1 6707.88,5182.1 6737.61,5211.83 P12.B6 6737.61,5342.33 6743.86,5348.58 6771.24,5348.58 6776.98,5342.83 P12.A6
PA13: P2.6 U2.46 | length 1016
  Top Layer w10: v2(5827.14,4083.78) U2.46
  Bottom Layer w10: P2.6 5261.55,4612.32 5261.55,4446.86 5391.28,4317.13 5520.05,4317.13 5753.41,4083.78 v2(5827.14,4083.78)
PA14: P2.8 U2.49 | length 879.9
  Top Layer w10: v2(5788.03,4134.36) 5815.24,4161.58 5815.24,4206.54 U2.49
  Bottom Layer w10: P2.8 5368.59,4605.28 5368.59,4418.93 5436.9,4350.62 5517.58,4350.62 5733.84,4134.36 v2(5788.03,4134.36)
PA15: P2.20 U2.50 | length 540.4
  Top Layer w10: U2.50 5795.91,4295.74 5966.41,4466.25 5966.41,4607.46 P2.20
PB0: P1.18 U2.26 | length 399.2
  Top Layer w8: U2.26 5697.48,3545.33 5813.72,3429.09 5813.72,3398.34 P1.18
PB1: P1.19 U2.27 | length 532.5
  Top Layer w8: U2.27 5717.17,3557.54 5868.78,3405.93 5868.78,3343.28 P1.19
PB3: P2.15 U2.55 | length 357.8
  Top Layer w10: U2.55 5697.48,4409.77 5717.45,4429.75 P2.15
PB4: P2.14 U2.56 | length 474.5
  Top Layer w10: P2.14 5663.84,4610.03 5663.84,4500.77 5677.8,4486.82 U2.56
PB5: P2.13 U2.57 | length 366.4
  Top Layer w10: P2.13 5619.98,4553.89 5619.98,4504.34 5658.11,4466.21 U2.57
PB6: P2.12 P10.A7 P10.B7 P11.2 U2.58 | length 2252.9
  Top Layer w10: P10.A7 4558.92,5348.57 4565.15,5354.8 4591.74,5354.8 4598.29,5348.25 P10.B7 4598.29,5209.01 4633.51,5173.8 4801.84,5173.8 4963.2,5335.16 5199.81,5335.16 5269.59,5265.39 5269.59,5130.87 P11.2 5269.59,5069.13 5269.59,4980.99 5485.26,4765.31 5485.26,4688.11 5516.95,4656.42 P2.12 5569.95,4603.92 5569.95,4471.55 5637.08,4404.42 5637.08,4226.44 5638.43,4225.1 U2.58
PB7: P2.11 P10.A6 P10.B6 P11.3 U2.59 | length 2229.4
  Top Layer w10: P10.B6 4539.24,5250.29 4549.47,5240.05 4569.45,5240.05 ; P10.A6 4578.61,5249.21 ; U2.59 5618.74,4225.1 5620.08,4226.44 5620.08,4397.38 5552.95,4464.51 5552.95,4520.92 P2.11 5509.21,4564.66 5512.81,4568.26 5512.81,4596.42 5468.26,4640.97 5468.26,4758.27 5252.59,4973.94 5252.59,5069.13 P11.3 5252.59,5130.87 5252.59,5258.35 5192.77,5318.16 4970.25,5318.16 4808.88,5156.8 4626.46,5156.8 4578.61,5204.65 4578.61,5230.89 ; 4569.45,5240.05 4578.61,5230.89 ; 4569.45,5240.05 4578.61,5240.05 ; 4569.45,5240.05 4578.61,5249.21 ; 4578.61,5230.89 4578.61,5240.05 ; 4578.61,5240.05 4578.61,5249.21
PB8: P2.9 U2.61 | length 416.6
  Top Layer w10: P2.9 5417.45,4548.73 5579.37,4386.81 U2.61
PB9: P2.7 U2.62 | length 483.4
  Top Layer w10: P2.7 5407.67,4466.2 5464.96,4466.2 5559.69,4371.48 U2.62
PB10: P1.21 U2.29 | length 607.2
  Top Layer w8: U2.29 5756.54,3570.03 5853.35,3473.22 5938.03,3473.22 5971.8,3439.45 5971.8,3340.26 P1.21
PB11: P1.22 U2.30 | length 509.1
  Top Layer w8: U2.30 5776.22,3573.29 5856.16,3493.34 5957.97,3493.34 6017.45,3433.86 P1.22
PB12: P1.23 U2.33 | length 658.8
  Top Layer w8: U2.33 5959.46,3827.87 6067.15,3720.18 6067.15,3344.91 P1.23
PB13: P1.24 U2.34 | length 589.8
  Top Layer w8: U2.34 5978.73,3847.56 6117.45,3708.83 P1.24
PB14: P1.25 U2.35 | length 767.8
  Top Layer w8: U2.35 6007.56,3867.24 6168.19,3706.61 6168.19,3343.87 P1.25
PB15: P1.26 U2.36 | length 705.8
  Top Layer w8: U2.36 6038.78,3886.93 6217.45,3708.26 P1.26
PC0: P1.3 U2.8 | length 958.8
  Top Layer w10: P1.3 5069.31,3342.75 5069.31,3534.63 5117.45,3582.77 5117.45,3830.05 5178.27,3890.87 5277.59,3890.87 5372.07,3985.35 U2.8
PC1: P1.4 U2.9 | length 797.5
  Top Layer w10: P1.4 5117.45,3537.35 5133.45,3553.35 5133.45,3823.43 5183.71,3873.68 5284.63,3873.68 5376.62,3965.67 U2.9
PC2: P1.5 U2.10 | length 888.2
  Top Layer w10: P1.5 5171.09,3340.97 5171.09,3499.28 5152.81,3517.56 5152.81,3820.13 5190.36,3857.68 5291.26,3857.68 5379.57,3945.98 U2.10
PC3: P1.6 U2.11 | length 752.2
  Top Layer w10: P1.6 5217.45,3542.77 5169.5,3590.72 5169.5,3812.88 5198.29,3841.68 5297.89,3841.68 5382.51,3926.3 U2.11
PC4: P1.16 U2.24 | length 374.1
  Top Layer w8: U2.24 5658.11,3497.21 5717.45,3437.87 P1.16
PC5: P1.17 U2.25 | length 507.4
  Top Layer w8: U2.25 5677.8,3524.95 5767.38,3435.36 5767.38,3344.67 P1.17
PC6: P1.27 U2.37 | length 908.2
  Top Layer w8: U2.37 6109.25,3906.61 6267.88,3747.98 6267.88,3344.18 P1.27
PC7: P2.28 U2.38 | length 1159.3
  Top Layer w10: U2.38 6265.86,3926.3 6367.31,4027.75 6367.31,4606.56 P2.28
PC8: P2.27 U2.39 | length 975.6
  Top Layer w10: U2.39 6227.11,3945.98 6317.45,4036.33 P2.27
PC9: P2.26 U2.40 | length 1071.8
  Top Layer w10: U2.40 6210.12,3965.67 6298.56,4054.11 6298.56,4459.72 6266.48,4491.81 6266.48,4607.39 P2.26
PC10: P2.19 U2.51 | length 408
  Top Layer w10: U2.51 5776.22,4310.47 5917.45,4451.7 P2.19
PC11: P2.18 U2.52 | length 515.9
  Top Layer w10: U2.52 5756.54,4330.78 5867.07,4441.31 5867.07,4606.8 P2.18
PC12: P2.17 U2.53 | length 382.9
  Top Layer w10: U2.53 5736.85,4343.35 5817.45,4423.95 P2.17
PC13: P1.10 U2.2 | length 918.4
  Top Layer w10: v2(5369.66,4173.89) 5369.66,4138.06 5404.26,4103.46 U2.2 ; P1.10 5418.47,3395.62 v2(5418.47,3745.67)
  Bottom Layer w10: v2(5369.66,4173.89) 5420.19,4123.37 5420.19,3747.39 v2(5418.47,3745.67)
PC14: C5.1 U2.3 Y2.1 | length 490.1
  Top Layer w8: Y2.1 5065.87,4304.13 5131.08,4238.92 5244.09,4238.92 5275,4208.01 C5.1 5276.28,4175.86 5297.79,4175.86 5389.87,4083.78 U2.3
PC15: C6.1 U2.4 Y2.2 | length 452.5
  Top Layer w8: Y2.2 5065.87,4205.71 5129.31,4142.26 5260.25,4142.26 5273.6,4128.91 5273.6,4106.53 C6.1 5328.66,4105.13 5369.7,4064.09 U2.4
PD0: C7.2 U2.5 Y1.2 | length 448.3
  Top Layer w10: Y1.2 5022.98,4026.26 5040.39,4008.84 5245.69,4008.84 5275,4038.15 C7.2@5275,4039.13 ; C7.2 5278.27,4044.41 U2.5
PD1: C8.2 U2.6 Y1.1 | length 516.7
  Top Layer w10: Y1.1 5114.31,3938.44 5257.35,3938.44 5268.14,3949.24 5268.14,3967.28 C8.2 5275,3975.12 5288.31,3988.43 5289.29,3988.43 5325.59,4024.72 U2.6
PD2: P2.16 U2.54 | length 489.2
  Top Layer w10: U2.54 5717.17,4380.43 5765.14,4428.41 5765.14,4608.73 P2.16
V5V: C12.1 F1.2 U1.3 | length 266.9
  Top Layer w30: F1.2 6585.97,3699.09 C12.1 6745.91,3699.09 U1.3
VBAT: C9.1 P2.1 U2.1 | length 746.2
  Top Layer w8: C9.1 5425.98,4267.08 5394.22,4235.32 5394.22,4134.72 5405.78,4123.15 U2.1
  Top Layer w30: P2.1 5017.45,4550.59 5263.91,4304.13 5410.68,4304.13 5424.99,4304.13 C9.1
VCC: C13.1 P1.1 P1.28 P2.2 P2.5 R1.2 R2.1 R3.1 R4.2 R7.1 R8.1 R9.1 U1.2 | length 7638.7
  Top Layer w30: R2.1 R3.1 4617.81,4042.81 v2(4619.95,4040.67) ; R4.2 4493.68,3632.48 4532.75,3671.55 v2(4626.56,3671.55) ; v2(5211.94,3664.86) 5211.94,3718.93 R7.1 ; R8.1 5946.58,3586.5 v2(6002.59,3530.49) ; R9.1 6052.99,4222.28 v2(6052.99,4256.45) ; R1.2 6885.63,3782.82 6837.67,3734.86 6837.67,3606.7 ; v2(6898.76,3566.83) 6880.12,3585.47 v2@6858.89,3585.47 ; 6837.67,3585.47 6837.67,3605.74 ; 6837.67,3585.47 v2@6858.89,3585.47 ; 6837.67,3585.47 U1.2 6837.67,3605.74 ; 6837.67,3605.74 6837.67,3606.7 ; 6837.67,3606.7 v2@6858.89,3585.47
  Bottom Layer w30: 4978.06,4469.51 4976.45,4469.51 ; P1.1 4744.25,3294.61 4626.56,3412.3 4626.56,3630.87 ; P2.2 4966.26,4656.42 4936.79,4626.95 4936.79,4509.18 ; P2.5 5130.55,4469.51 4976.45,4469.51 ; 6052.99,3658.65 6052.99,3621.92 ; v2(6052.99,4256.45) 6052.99,3621.92 ; P1.28 6317.45,3531.33 ; v2(6898.76,3566.83) 6884.7,3580.9 v2(6867.75,3580.9) 6359.95,3580.9 ; 4626.56,3630.87 4662.25,3666.56 ; 4626.56,3630.87 v2@4626.56,3667.27 ; v2@4626.56,3667.27 v2(4626.56,3671.55) 4626.56,3704.55 ; v2@4626.56,3667.27 4627.27,3666.56 4662.25,3666.56 ; 4626.56,3704.55 4658.1,3673 ; 4626.56,3704.55 4626.56,4039.96 4627.27,4040.67 4627.27,4350.29 4746.49,4469.51 4897.12,4469.51 ; 4658.1,3673 4664.55,3666.56 ; 4658.1,3673 5203.8,3673 v2@5210.24,3666.56 ; 4662.25,3666.56 4664.55,3666.56 ; 4664.55,3666.56 v2@5210.24,3666.56 ; 4897.12,4469.51 4936.79,4469.51 ; 4897.12,4469.51 4936.79,4509.18 ; 4936.79,4469.51 4976.45,4469.51 ; 4936.79,4469.51 4936.79,4509.18 ; 4936.79,4509.18 4976.45,4469.51 ; v2@5210.24,3666.56 v2(5211.94,3664.86) 5411.18,3465.62 5937.71,3465.62 v2(6002.59,3530.49) 6052.99,3580.9 ; 6052.99,3580.9 6094.02,3580.9 ; 6052.99,3580.9 6052.99,3621.92 ; 6052.99,3621.92 6094.02,3580.9 ; 6094.02,3580.9 6267.88,3580.9 ; 6267.88,3580.9 6317.45,3580.9 ; 6267.88,3580.9 6317.45,3531.33 ; 6317.45,3531.33 6317.45,3538.39 ; 6317.45,3538.39 6317.45,3580.9 ; 6317.45,3538.39 6359.95,3580.9 ; 6317.45,3580.9 6359.95,3580.9
VDD: C2.2 C4.2 R9.2 U2.19 U2.48 | length 1412.9
  Top Layer w8: C4.2@5540,3639.13 5540.98,3639.13 C4.2@5544.49,3642.64 ; C4.2 5540.98,3647.13 5555.29,3661.44 5555.29,3662.43 5559.69,3666.82 U2.19 ; U2.48 5964.03,4123.15 C2.2@5989.84,4148.96
  Top Layer w30: C4.2 v2(5540,3676.03) ; C2.2@5989.84,4148.96 C2.2@5990.33,4149.45 ; C2.2 R9.2
  Bottom Layer w30: v2(5540,3676.03) 5684.34,3531.69 5883.45,3531.69 5965.83,3614.07 5965.83,4160.93 v2(5989.82,4184.93)
VDDA: C10.1 R7.2 U2.13 | length 271.6
  Top Layer w10: C10.1 5303.2,3792.13 5398,3886.93 U2.13
  Top Layer w30: R7.2 C10.1
VIO: C1.2 C3.2 R8.2 U2.32 U2.64 | length 1012.7
  Top Layer w9: U2.32 5815.59,3703.47 5831.53,3687.53 v2(5831.53,3686.87)
  Top Layer w10: v2(5505,4274.05) 5520.32,4258.73 U2.64
  Top Layer w20: v2(5831.53,3686.87) 5831.53,3648.61 C1.2
  Top Layer w30: v2(5505,4274.05) C3.2 ; C1.2 R8.2
  Bottom Layer w30: v2(5505,4274.05) 5831.53,3947.52 v2(5831.53,3686.87)
pads on no net: P10.A8 P10.B8 P12.A8 P12.B8 S2.0 S2.2 U2.0

## Polygon pours and split planes (outlines as drawn)
GND on Bottom Layer "GND" (hatched 90Degree grid 8 track 8, remove dead copper, pour order 1): 4290,5604.06 4290,3045 4295.94,3039.06 7056.05,3039.06 7056.05,5601.41 7060.13,5605.49
GND on Top Layer "GND" (hatched 90Degree grid 8 track 8, remove dead copper, pour order 0): 4290,5604.06 4290,3045 7045.91,3045 7045.91,5604.06

## Keep-outs
Keep-Out Layer:
  the board outline again, w15

## Silkscreen, mask and mechanical layers (free items; w line width, h text height)
Top Overlay:
  text "NRST" at 5395.83,4856.93 h35 r270
  text "PA14" at 5295.65,4854.93 h35 r270
  text "PA13" at 5195.46,4853.26 h35 r270
  text "PA15" at 5896.76,4853.26 h35 r270
  text "PC11" at 5796.58,4838.27 h35 r270
  text "PA11" at 5996.95,4838.27 h35 r270
  text "GND" at 5095.27,4827.6 h35 r270
  text "PC7" at 6297.51,4827.6 h35 r270
  text "PB4" at 5596.21,4825.6 h35 r270
  text "PA9" at 6097.14,4825.94 h35 r270
  text "PC9" at 6197.32,4825.94 h35 r270
  text "GND" at 4696.61,4823.94 h35 r270
  text "GND" at 4797.98,4823.94 h35 r270
  text "3V3" at 4995.09,4823.94 h35 r270
  text "PD2" at 5696.39,4823.94 h35 r270
  text "PB6" at 5496.02,4822.27 h35 r270
  text "LED1" at 4350.25,4631.97 h35
  text "LED2" at 4335.26,4535.86 h35
  text "VBAT" at 4995.09,4497.94 h35 r270
  text "GND" at 5095.27,4497.94 h35 r270
  text "3V3" at 5195.46,4497.94 h35 r270
  text "PB9" at 5295.65,4497.94 h35 r270
  text "PB8" at 5395.83,4497.94 h35 r270
  text "PB7" at 5496.02,4497.94 h35 r270
  text "PB5" at 5596.21,4497.94 h35 r270
  text "PB3" at 5696.39,4497.94 h35 r270
  text "PC12" at 5796.58,4497.94 h35 r270
  text "PC10" at 5896.76,4497.94 h35 r270
  text "PA12" at 5996.95,4497.94 h35 r270
  text "PA10" at 6097.14,4497.94 h35 r270
  text "PA8" at 6197.32,4497.94 h35 r270
  text "PC8" at 6297.51,4497.94 h35 r270
  text "BOOT0" at 4696.61,4492.96 h35 r270
  text "BOOT1" at 4797.98,4492.96 h35 r270
  text "CH32F20xR-R0-1v0" at 6409.83,4291.9 h40
  text "PC13" at 5394.25,3587.47 h35 r270
  text "PB13" at 6094.03,3581.81 h35 r270
  text "PB15" at 6194,3581.81 h35 r270
  text "PB11" at 5994.06,3566.81 h35 r270
  text "PC4" at 5694.16,3563.48 h35 r270
  text "GND" at 4994.38,3561.81 h35 r270
  text "PC3" at 5194.32,3561.81 h35 r270
  text "PA6" at 5594.19,3560.15 h35 r270
  text "3V3" at 6293.96,3556.15 h35 r270
  text "PA4" at 5494.22,3554.48 h35 r270
  text "PB0" at 5794.13,3549.15 h35 r270
  text "PB2" at 5894.09,3549.15 h35 r270
  text "PC1" at 5094.35,3546.81 h35 r270
  text "PA1" at 5294.29,3546.81 h35 r270
  text "3V3" at 4994.38,3227.43 h35 r270
  text "PC0" at 5094.35,3227.43 h35 r270
  text "PC2" at 5194.32,3227.43 h35 r270
  text "PA0" at 5294.29,3227.43 h35 r270
  text "PA2" at 5394.25,3227.43 h35 r270
  text "PA3" at 5494.22,3227.43 h35 r270
  text "PA5" at 5594.19,3227.43 h35 r270
  text "PA7" at 5694.16,3227.43 h35 r270
  text "PC5" at 5794.13,3227.43 h35 r270
  text "PB1" at 5894.09,3227.43 h35 r270
  text "PB10" at 5994.06,3227.43 h35 r270
  text "PB12" at 6094.03,3227.43 h35 r270
  text "PB14" at 6194,3227.43 h35 r270
  text "PC6" at 6293.96,3227.43 h35 r270
  text "ON" at 6638.49,3168.16 h35
  text "OFF" at 6796.36,3168.16 h35
Mechanical 1:
  the board outline again, w10

## Text inside footprints (layer, text, board x,y; h text height)
D1: Top Overlay "+" at 6788.3,3940.68 h40 r90
D2: Top Overlay "+" at 4477.86,4182.39 h40 r180
D3: Top Overlay "+" at 4552.13,4182.39 h40 r180
P11: Top Overlay "G" at 5138.88,5220 h40 r180; Top Overlay "V" at 5418.88,5220 h40 r180; Top Overlay "D+" at 5248.88,5220 h40 r180; Top Overlay "D-" at 5338.88,5220 h40 r180
P13: Top Overlay "G" at 5952.61,5220 h40 r180; Top Overlay "V" at 6232.61,5220 h40 r180; Top Overlay "D+" at 6062.61,5220 h40 r180; Top Overlay "D-" at 6152.61,5220 h40 r180